# EAGLE board SX-Belegtmelder V01.10 (EAGLE 9.4.1)
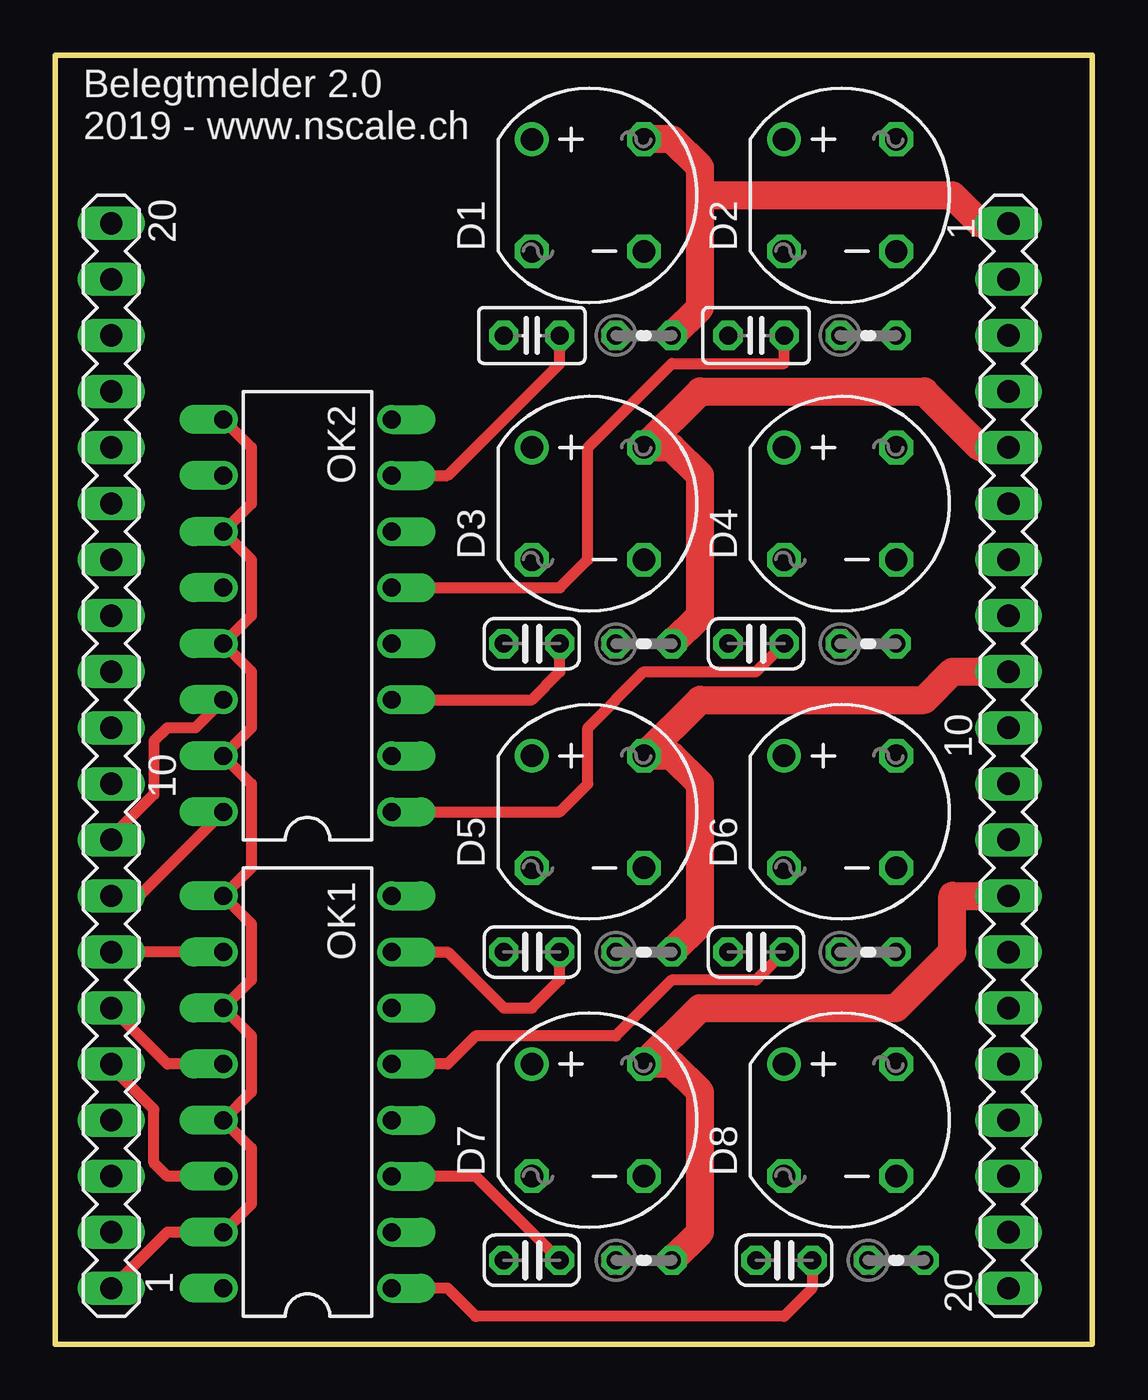
[diagram p0: board, top side]
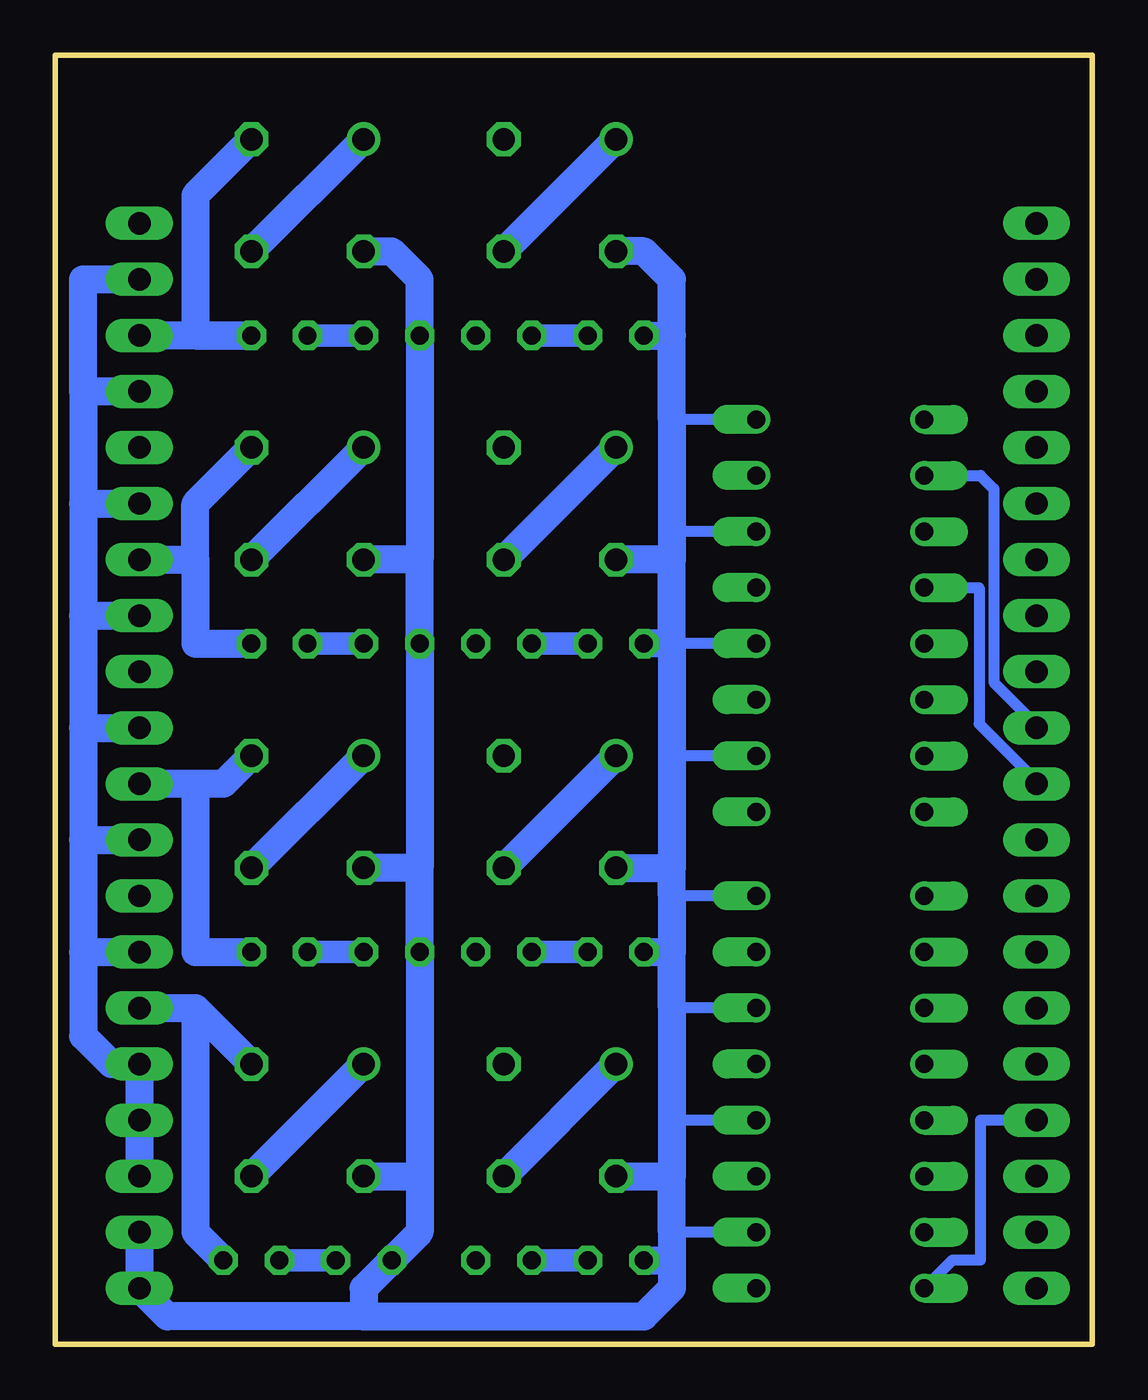
[diagram p1: board, bottom side, seen from below]

Size 46.99 x 58.42 mm. Coordinates in mm from the lower left corner, seen from the top.
Outline: 0,0 46.99,0 46.99,58.42 0,58.42 0,0
Copper layers (1*16): Top 0.035mm / dielectric 1.5mm / Bottom 0.035mm
Design rules "Elecrow_2-layer_eagle_rule": minimum track width 6mil, minimum drill 12mil, track to track 6mil, track to pad 6mil, pad to pad 6mil, via to via 6mil, smd to smd 0mil, copper to edge 10mil, drill to drill 10mil, minimum pad ring 10mil, minimum via ring 6mil, stop-mask expansion 2mil, vias tented up to drill 100mil, thermal gap 10mil

## Footprints (pad centres in the part's own frame; a part is rotated, then mirrored left to right if it is on the bottom)
C025-025X050 = drill 0.813 octagon: 1 -1.27,0; 2 1.27,0
C025-024X044 = drill 0.813 octagon: 1 -1.27,0; 2 1.27,0
RB1A = drill 1.016: + -2.54,2.54 | drill 1.016 octagon: - 2.54,-2.54; AC1 2.54,2.54; AC2 -2.54,-2.54
MA20-1 = drill 1.016 long: 1 -24.13,0; 2 -21.59,0; 3 -19.05,0; 4 -16.51,0; 5 -13.97,0; 6 -11.43,0; 7 -8.89,0; 8 -6.35,0; 9 -3.81,0; 10 -1.27,0; 11 1.27,0; 12 3.81,0; 13 6.35,0; 14 8.89,0; 15 11.43,0; 16 13.97,0; 17 16.51,0; 18 19.05,0; 19 21.59,0; 20 24.13,0
DIL16 = drill 0.813 offset: 1 -8.89,-3.81; 2 -6.35,-3.81; 3 -3.81,-3.81; 4 -1.27,-3.81; 5 1.27,-3.81; 6 3.81,-3.81; 7 6.35,-3.81; 8 8.89,-3.81; 9 8.89,3.81; 10 6.35,3.81; 11 3.81,3.81; 12 1.27,3.81; 13 -1.27,3.81; 14 -3.81,3.81; 15 -6.35,3.81; 16 -8.89,3.81
0204V = drill 0.813 octagon: 1 -1.27,0; 2 1.27,0

## Placement (x,y rotation side)
C1  100n  [C025-025X050]  21.59,45.72 0 top
C2  100n  [C025-025X050]  31.75,45.72 0 top
C3  100n  [C025-024X044]  21.59,31.75 0 top
C4  100n  [C025-024X044]  31.75,31.75 0 top
C5  100n  [C025-024X044]  21.59,17.78 0 top
C6  100n  [C025-024X044]  31.75,17.78 0 top
C7  100n  [C025-024X044]  21.59,3.81 0 top
C8  100n  [C025-024X044]  33.02,3.81 0 top
D1  [RB1A]  24.13,52.07 0 top
D2  [RB1A]  35.56,52.07 0 top
D3  [RB1A]  24.13,38.1 0 top
D4  [RB1A]  35.56,38.1 0 top
D5  [RB1A]  24.13,24.13 0 top
D6  [RB1A]  35.56,24.13 0 top
D7  [RB1A]  24.13,10.16 0 top
D8  [RB1A]  35.56,10.16 0 top
J1  [MA20-1]  2.54,26.67 90 top
J2  [MA20-1]  43.18,26.67 270 top
OK1  LTV844  [DIL16]  11.43,11.43 90 top
OK2  LTV844  [DIL16]  11.43,33.02 90 top
R1  33  [0204V]  26.67,45.72 0 top
R2  33  [0204V]  36.83,45.72 0 top
R3  33  [0204V]  26.67,31.75 0 top
R4  33  [0204V]  36.83,31.75 0 top
R5  33  [0204V]  26.67,17.78 0 top
R6  33  [0204V]  36.83,17.78 0 top
R7  33  [0204V]  26.67,3.81 0 top
R8  33  [0204V]  38.1,3.81 0 top

## Library data of the parts
C1-C8 R1-R8 = rcl
D1-D8 = rectifier
J1 J2 = con-lstb; OC_FARNELL: unknown; OC_NEWARK: unknown
OK1 OK2 = optocoupler; MF: VISHAY/TELEFUNKEN; MPN: ILQ620; OC_FARNELL: 1612470; OC_NEWARK: 58K1694

## Nets
N$1: D1.AC1 J2.1 R1.2
N$10: J1.4 OK1.16
N$11: J1.5 OK1.14
N$12: J1.6 OK1.12
N$13: J1.7 OK1.10
N$14: J1.8 OK2.16
N$15: J1.9 OK2.14
N$16: J1.10 OK2.12
N$17: C1.2 OK2.7 R1.1
N$18: C2.2 OK2.5 R2.1
N$19: C3.2 OK2.3 R3.1
N$20: C4.2 OK2.1 R4.1
N$21: C5.2 OK1.7 R5.1
N$22: C6.2 OK1.5 R6.1
N$23: C7.2 OK1.3 R7.1
N$24: C8.2 OK1.1 R8.1
N$25: J1.11 OK2.10
N$34: J1.1 OK1.9 OK1.11 OK1.13 OK1.15 OK2.9 OK2.11 OK2.13 OK2.15
S$1: D5.+ D5.-
S$2: D3.AC1 J2.5 R3.2
S$3: C1.1 C2.1 C3.1 C4.1 C5.1 C6.1 C7.1 C8.1 D1.AC2 D2.AC2 D3.AC2 D4.AC2 D5.AC2 D6.AC2 D7.AC2 D8.AC2 J2.19 J2.20 OK1.2 OK1.4 OK1.6 OK1.8 OK2.2 OK2.4 OK2.6 OK2.8
S$4: D7.+ D7.-
S$5: D8.+ D8.-
S$6: D3.+ D3.-
S$7: D2.AC1 J2.3 R2.2
S$8: D4.+ D4.-
S$9: D4.AC1 J2.7 R4.2
S$10: D5.AC1 J2.9 R5.2
S$11: D6.AC1 J2.11 R6.2
S$12: D6.+ D6.-
S$13: D1.+ D1.-
S$14: D2.+ D2.-
S$15: D7.AC1 J2.13 R7.2
S$16: D8.AC1 J2.15 R8.2
S$17: J2.2 J2.4 J2.6 J2.8 J2.10 J2.12 J2.14 J2.16 J2.17 J2.18

## Tracks (layer width: path | path; a pad name or v marks a point on that pad's centre or on a via)
N$1
  Top 1.27: R1.2 29.21,46.99 29.21,52.07 | 29.21,52.07 29.21,53.34 27.94,54.61 D1.AC1 | 29.21,52.07 40.64,52.07 41.91,50.8 J2.1
N$10
  Bottom 0.508: OK1.16 6.35,3.81 5.08,3.81 5.08,10.16 J1.4
N$11
  Top 0.508: OK1.14 5.08,7.62 4.47,8.23 4.47,10.64 2.54,12.57 J1.5
N$12
  Top 0.508: OK1.12 5.08,12.7 J1.6
N$13
  Top 0.508: OK1.10 J1.7
N$14
  Top 0.508: OK2.16 3.81,20.32 J1.8 | J1.8 1.27,20.32 J1.8
N$15
  Top 0.508: OK2.14 6.35,27.94 5.08,27.94 4.47,27.33 4.47,24.92 2.54,22.99 J1.9
N$16
  Bottom 0.508: OK2.12 5.13,34.29 5.13,28.12 2.54,25.53 J1.10
N$17
  Top 0.508: OK2.7 17.78,39.37 22.86,44.45 C1.2
  Bottom 1.016: R1.1 C1.2
N$18
  Top 0.508: OK2.5 22.86,34.29 24.13,35.56 24.13,40.64 27.94,44.45 33.02,44.45 C2.2
  Bottom 1.016: R2.1 C2.2
N$19
  Top 0.508: OK2.3 21.59,29.21 22.86,30.48 C3.2
  Bottom 1.016: R3.1 C3.2
N$20
  Top 0.508: OK2.1 22.86,24.13 24.13,25.4 24.13,27.94 26.67,30.48 31.75,30.48 C4.2
  Bottom 1.016: R4.1 C4.2
N$21
  Top 0.508: OK1.7 17.78,17.78 20.32,15.24 21.59,15.24 22.86,16.51 C5.2
  Bottom 1.016: R5.1 C5.2
N$22
  Top 0.508: C6.2 31.75,16.51 27.94,16.51 25.4,13.97 19.05,13.97 17.78,12.7 OK1.5
  Bottom 1.016: R6.1 C6.2
N$23
  Top 0.508: C7.2 19.05,7.62 OK1.3
  Bottom 1.016: R7.1 C7.2
N$24
  Top 0.508: C8.2 34.29,2.54 33.02,1.27 19.05,1.27 17.78,2.54 OK1.1
  Bottom 1.016: R8.1 C8.2
N$25
  Bottom 0.508: OK2.10 5.08,39.37 4.47,38.76 4.47,30 2.54,28.07 J1.11
N$34
  Top 0.508: OK2.9 8.89,40.64 8.89,38.1 OK2.11 8.89,35.56 8.89,33.02 OK2.13 8.89,30.48 8.89,27.94 OK2.15 8.89,25.4 8.89,21.59 OK1.9 8.89,19.05 8.89,16.51 OK1.11 8.89,13.97 8.89,11.43 OK1.13 8.89,8.89 8.89,6.35 OK1.15 5.08,5.08 J1.1
S$1
  Bottom 1.27: D5.+ D5.-
S$2
  Top 1.27: R3.2 29.21,33.02 29.21,39.37 27.94,40.64 D3.AC1 29.21,43.18 39.37,43.18 41.91,40.64 J2.5
S$3
  Bottom 0.254: 15.32,36.8 OK2.6
  Bottom 0.508: OK1.2 19.05,5.08 | OK1.4 19.05,10.16 | OK1.6 19.05,15.24 | OK1.8 19.05,20.32 | OK2.2 19.05,26.67 | OK2.4 19.05,31.75 | OK2.6 19.05,36.83 | OK2.8 19.05,41.91
  Bottom 1.27: J2.19 J2.20 41.91,1.27 33.02,1.27 | D2.AC2 31.75,49.53 30.48,48.26 C2.1 30.48,35.56 | 30.48,35.56 D4.AC2 | 30.48,35.56 C4.1 30.48,21.59 | 30.48,21.59 D6.AC2 | 30.48,7.62 C6.1 30.48,21.59 | 30.48,7.62 30.48,5.08 C8.1 33.02,2.54 33.02,1.27 | D8.AC2 30.48,7.62 | 33.02,1.27 20.32,1.27 19.05,2.54 19.05,3.81 | 19.05,7.62 19.05,5.08 19.05,3.81 | 19.05,17.78 19.05,20.32 19.05,21.59 | 19.05,17.78 19.05,15.24 19.05,10.16 19.05,7.62 | C7.1 19.05,3.81 | D7.AC2 19.05,7.62 | D5.AC2 19.05,21.59 | C5.1 19.05,17.78 | 19.05,21.59 19.05,26.67 19.05,31.75 | 19.05,31.75 19.05,35.56 | 19.05,35.56 D3.AC2 | 19.05,31.75 C3.1 | 19.05,45.72 19.05,41.91 19.05,36.83 19.05,35.56 | 19.05,45.72 19.05,48.26 20.32,49.53 D1.AC2 | C1.1 19.05,45.72
S$4
  Bottom 1.27: D7.+ D7.-
S$5
  Bottom 1.27: D8.+ D8.-
S$6
  Bottom 1.27: D3.+ D3.-
S$7
  Bottom 1.27: D2.AC1 40.64,52.07 40.64,45.72 R2.2 J2.3
S$8
  Bottom 1.27: D4.+ D4.-
S$9
  Bottom 1.27: D4.AC1 40.64,38.1 40.64,35.56 | 40.64,35.56 40.64,31.75 R4.2 | J2.7 40.64,35.56
S$10
  Top 1.27: R5.2 29.21,19.05 29.21,25.4 27.94,26.67 D5.AC1 29.21,29.21 39.37,29.21 40.64,30.48 J2.9
S$11
  Bottom 1.27: D6.AC1 39.37,25.4 40.64,25.4 | 40.64,25.4 J2.11 | 40.64,25.4 40.64,17.78 R6.2
S$12
  Bottom 1.27: D6.+ D6.-
S$13
  Bottom 1.27: D1.+ D1.-
S$14
  Bottom 1.27: D2.+ D2.-
S$15
  Top 1.27: R7.2 29.21,5.08 29.21,11.43 27.94,12.7 D7.AC1 29.21,15.24 38.1,15.24 40.64,17.78 40.64,20.32 J2.13
S$16
  Bottom 1.27: J2.15 40.64,15.24 | 40.64,15.24 D8.AC1 | 40.64,15.24 40.64,5.08 R8.2
S$17
  Bottom 1.27: J2.18 J2.17 J2.16 44.45,12.7 45.72,13.97 45.72,17.78 | J2.4 45.72,43.18 | 45.72,43.18 45.72,38.1 | 45.72,38.1 J2.6 | 45.72,38.1 45.72,33.02 | 45.72,33.02 J2.8 | 45.72,33.02 45.72,27.94 | 45.72,27.94 J2.10 | 45.72,27.94 45.72,22.86 | 45.72,22.86 J2.12 | 45.72,22.86 45.72,17.78 | 45.72,17.78 J2.14 | 45.72,43.18 45.72,48.26 J2.2

## Text on the board
tNames: Belegtmelder 2.0 / 2019 - www.nscale.ch